# Altium PCB LED_PCB.PcbDoc
Units mm, origin at the board's own origin, x right, y up, seen from the top; angles counter-clockwise.
Board outline 99.87 x 66.87 mm, 2 copper layers (Top Layer, Bottom Layer); 110 components, 90 nets, 363 pads, 30 vias.
Unrouted connection lines stored in the file: 175.
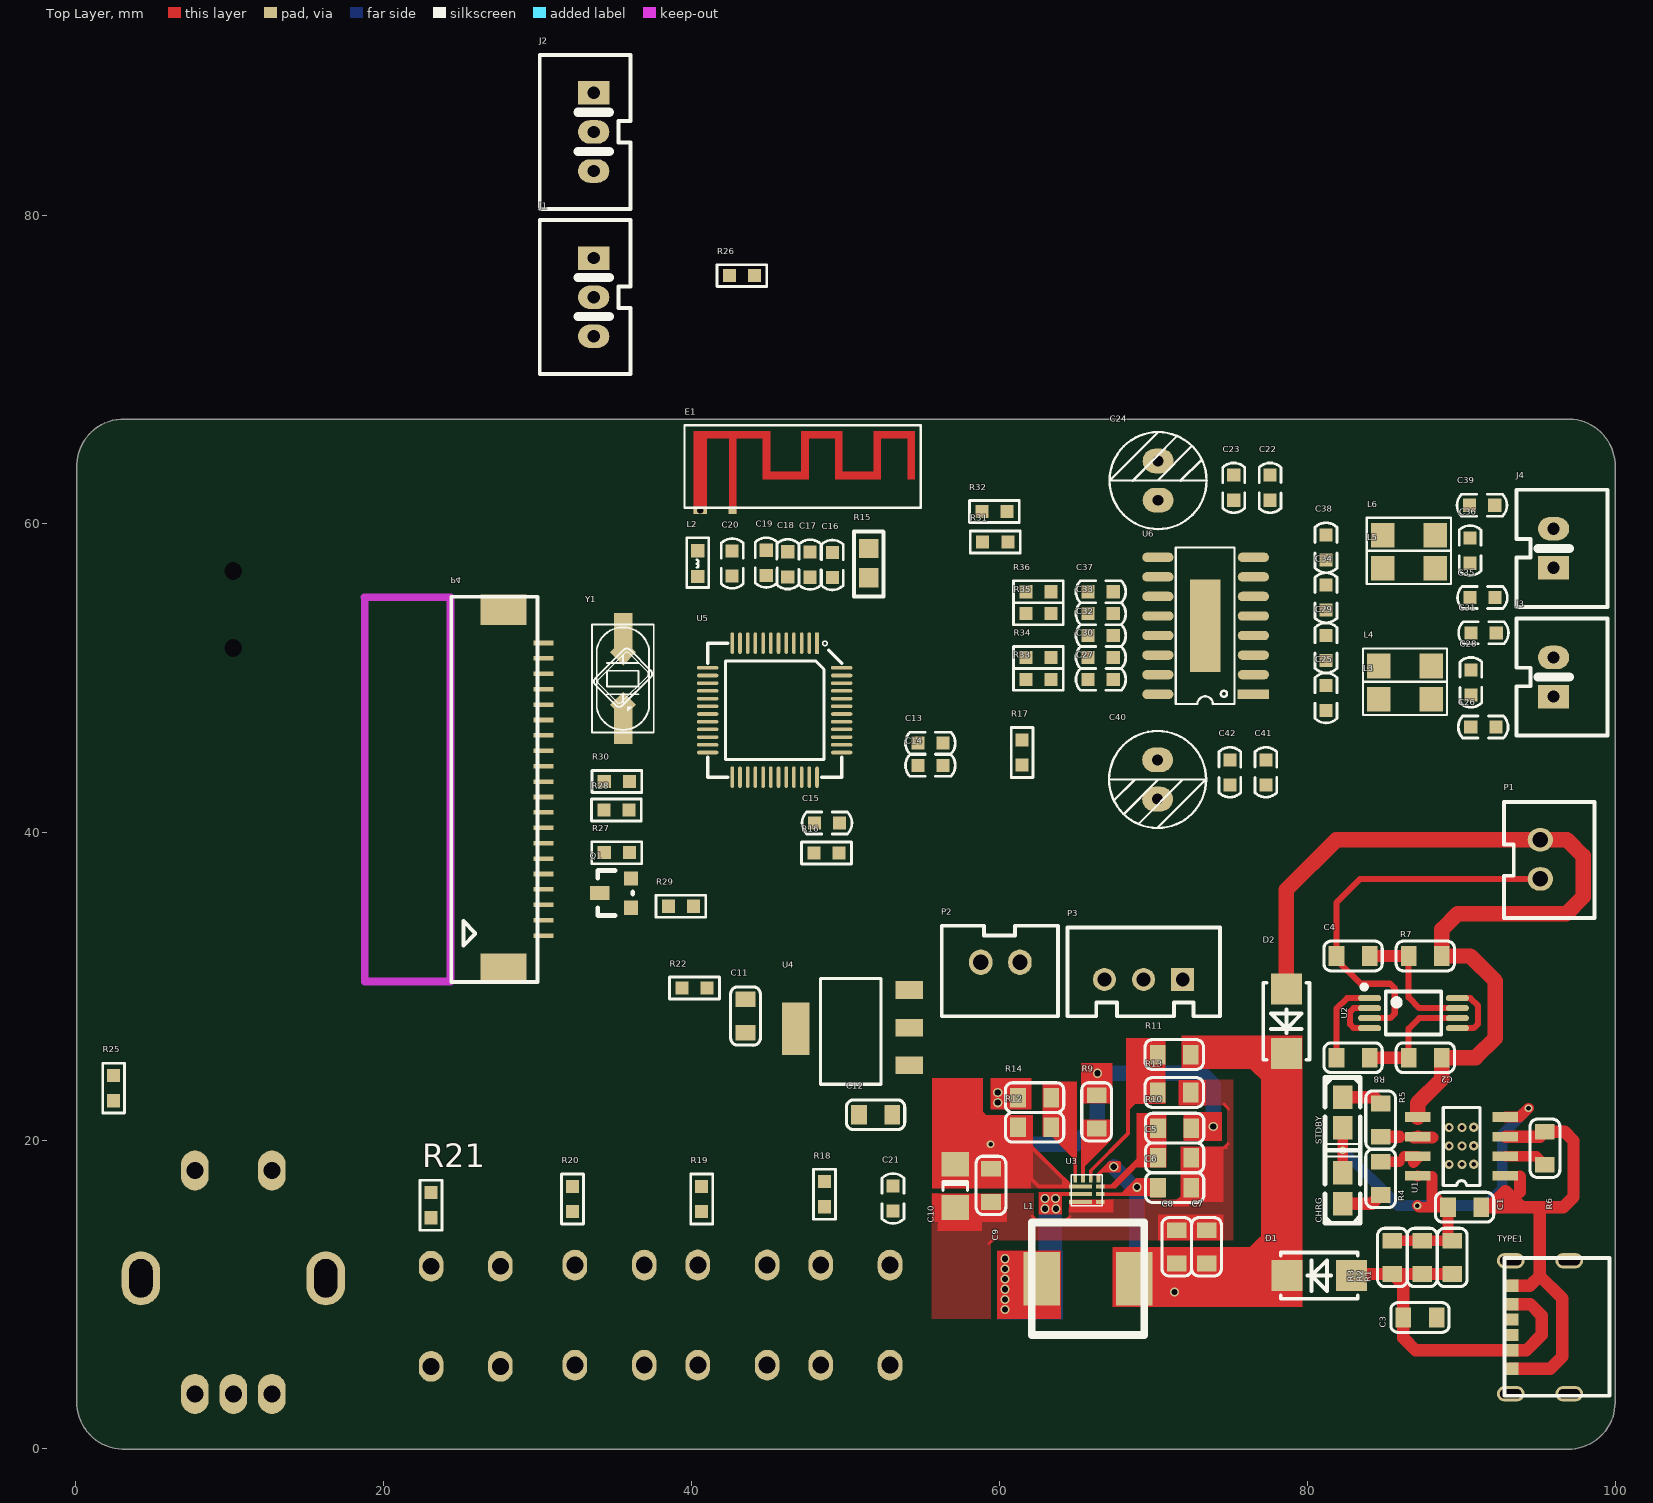
[diagram p0: Top Layer view]
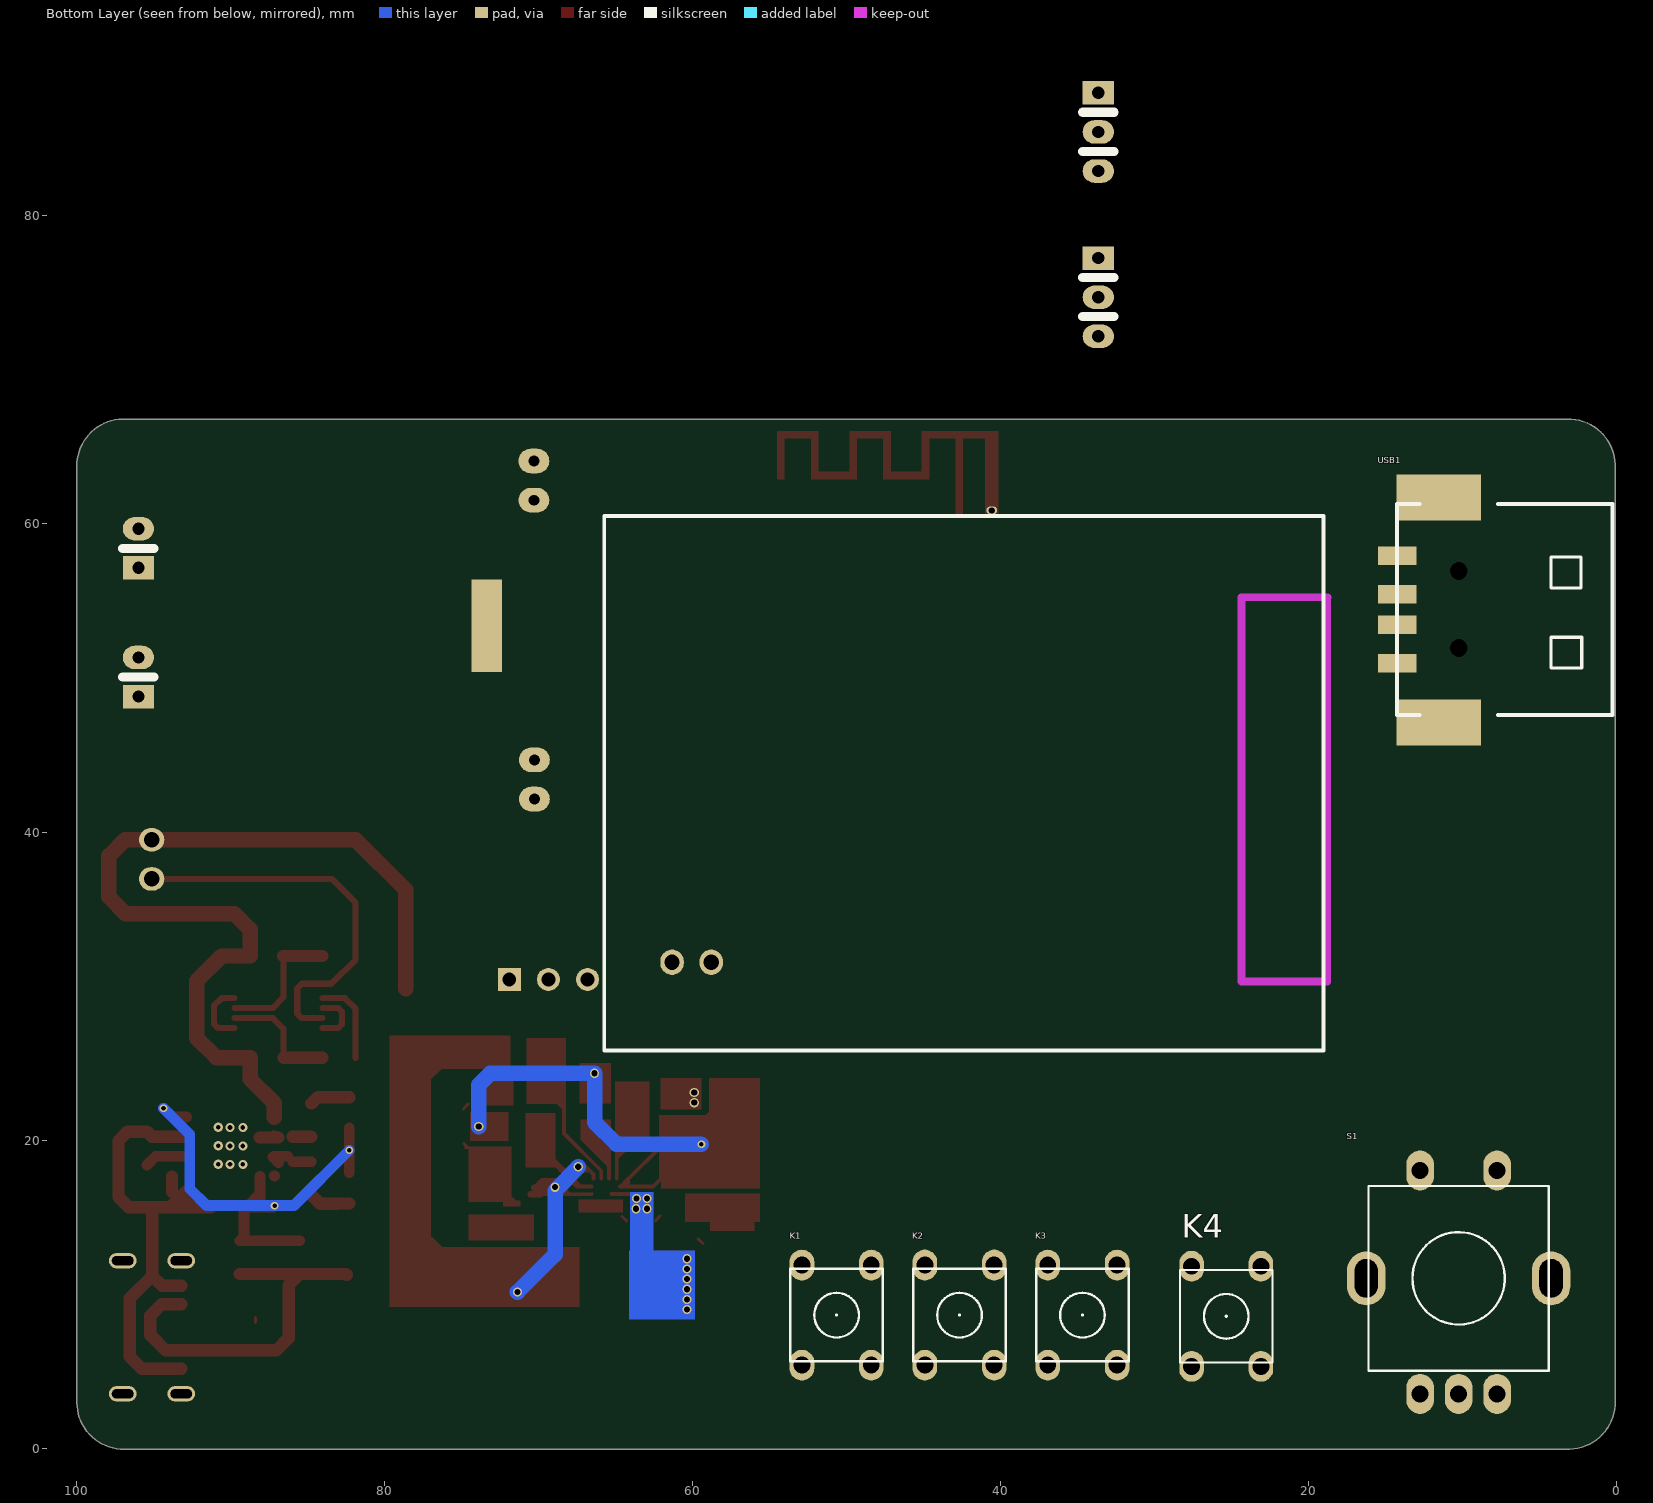
[diagram p1: Bottom Layer view, seen from below]

## Layer stack, top to bottom
Top Solder: solder mask 0.0102, Solder Resist, Dk 3.5
Top Layer: signal copper 0.0356
Dielectric 1: dielectric 0.32, FR-4, Dk 4.8
Bottom Layer: signal copper 0.0356
Bottom Solder: solder mask 0.0102, Solder Resist, Dk 3.5

## Board outline
0.081,2.784 0.081,22.784 cw(c0.208,22.784) 0.081,22.784 0.081,63.598 cw(c3.104,63.779) 2.917,66.802 cw(c3.104,63.779) 2.918,66.802 2.917,66.802 cw(c2.926,66.675) 2.926,66.802 96.698,66.802 cw(c96.698,66.675) 96.718,66.801 cw(c96.737,66.675) 96.729,66.802 cw(c96.915,63.779) 99.938,63.965 cw(c99.811,63.957) 99.938,63.957 99.938,3.143 cw(c96.915,2.962) 99.943,2.962 cw(c96.915,2.962) 97.126,-0.059 cw(c97.104,0.066) 97.104,-0.061 3.286,-0.061 cw(c3.104,2.962) 0.081,2.776 cw(c0.208,2.784)

## Design rules (kind name [scope] priority, off if disabled: settings)
Clearance [All] p1: gap=0
ComponentClearance [All] p1: gap=0 collisioncheckmode=3 verticalgap=0 showdistances=FALSE
HoleSize [All] p1: absolutevalues=TRUE maxlimit=10 minlimit=0 maxpercent=80.000 minpercent=20.000
HoleToHoleClearance [All] p1: gap=0 allowstackedmicrovias=TRUE
MinimumSolderMaskSliver [All] p1: minsoldermaskwidth=0
PolygonConnect [All] p1: connectstyle=Relief reliefconductorwidth=0.254 reliefentries=4 polygonreliefangle="90 Angle" airgapwidth=0.254
RoutingVias [All] p1: holewidth=0.711 width=1.27 viastyle="Through Hole" minholewidth=0 minwidth=0 maxholewidth=0.711 maxwidth=1.27
SilkToSilkClearance [All] p1: silktosilkclearance=0
SilkToSolderMaskClearance [IsPad] p1: minsilkscreentomaskgap=0 clearancetoexposedcopper=TRUE
SolderMaskExpansion [All] p1: expansion=0.102
Width [All] p1: maxlimit=10 minlimit=0.01 preferedwidth=0.254 minimp=50.000000 maximp=50.000000 favimp=50.000000
24 further rules are at their usual default settings.

## Classes and differential pairs
component class LED原理图: C1 C2 C3 C4 C5 C6 C7 C8 C9 C10 C11 C12 CHRG D1 D2 L1 P1 P2 P3 R1 R2 R3 R4 R5 R6 R7 R8 R9 R10 R11 R12 R13 R14 STDBY TYPE1 U1 U2 U3 U4 U?
component class BLE主控原理图: C13 C14 C15 C16 C17 C18 C19 C20 C21 E1 J1 J2 K1 K2 K3 K4 L2 P4 Q1 R15 R16 R17 R18 R19 R20 R21 R22 R25 R26 R27 R28 R29 R30 S1 U5 USB1 Y1
component class 功放原理图: C22 C23 C24 C25 C26 C27 C28 C29 C30 C31 C32 C33 C34 C35 C36 C37 C38 C39 C40 C41 C42 J3 J4 L3 L4 L5 L6 R31 R32 R33 R34 R35 R36 U6

## Components (designator, comment, footprint, x,y, rotation, side; value= is the part's Value field where it differs from the comment)
C1 "Cap" 0805C 89.091,15.644 r0 top
C2 "Cap" 0805C 88.699,25.347 r180 top
C3 "Cap" 0805C 88.354,8.481 r180 top
C4 "Cap" 0805C 81.852,31.951 r0 top
C5 "Cap" 0805C 72.426,18.848 r180 top
C6 "Cap" 0805C 70.269,16.918 r0 top
C7 "Cap" 0805C 73.419,14.149 r270 top
C8 "Cap" 0805C 71.488,14.149 r270 top
C9 "Cap" 0805C 59.423,18.137 r270 top
C10 "Cap2" C1206 57.112,17.019 r270 top
C11 "Cap" 0805C 43.485,26.975 r90 top
C12 "Cap" 0805C 53.01,21.641 r180 top
C13 "105" C0603 55.499,45.771 r0 top
C14 "105" C0603 55.499,44.323 r0 top
C15 "105" C0603 48.768,40.589 r180 top
C16 "105" C0603 49.124,57.328 r270 top
C17 "105" C0603 47.676,57.353 r270 top
C18 "105" C0603 46.228,57.379 r270 top
C19 "105" C0603 44.831,57.48 r270 top
C20 "2.7P" C0603 42.621,57.429 r270 top
C21 "NC/100pF" C0603 53.061,16.199 r270 top
C22 "104" C0603 77.546,62.357 r90 top
C23 "105" C0603 75.184,62.357 r90 top
C24 "220uF/25V" EC2.5-6.3 70.282,62.816 r90 top
C25 "105" C0603 81.174,48.692 r270 top
C26 "105" C0603 91.389,46.812 r0 top
C27 "225" C0603 66.546,49.911 r180 top
C28 "474" C0603 90.576,49.708 r270 top
C29 "105" C0603 81.174,51.943 r270 top
C30 "225" C0603 66.546,51.333 r180 top
C31 "105" C0603 91.415,52.934 r0 top
C32 "105" C0603 66.546,52.756 r180 top
C33 "225" C0603 66.546,54.178 r180 top
C34 "105" C0603 81.178,55.22 r90 top
C35 "105" C0603 91.338,55.22 r0 top
C36 "474" C0603 90.526,58.268 r270 top
C37 "225" C0603 66.546,55.601 r180 top
C38 "105" C0603 81.178,58.471 r90 top
C39 "105" C0603 91.313,61.214 r0 top
C40 "220uF/25V" EC2.5-6.3 70.231,43.411 r270 top
C41 "105" C0603 77.267,43.868 r270 top
C42 "104" C0603 74.93,43.868 r270 top
CHRG "RED" LED-0805 82.258,15.879 r90 top
D1 "SS34" LC-SMA(DO-214AC)_S2 80.734,11.199 r0 top
D2 "SS34" LC-SMA(DO-214AC)_S2 78.6,27.713 r90 top
E1 "BT_ANT" 新F天线 42.647,60.884 r0 top
J1 "LED" CON-3X2.54 33.63,74.727 r270 top
J2 "CON3" CON-3X2.54 33.63,85.454 r270 top
J3 "喇叭" CON-2X2.54 95.946,48.793 r90 top
J4 "喇叭" CON-2X2.54 95.946,57.15 r90 top
K1 "" KEY 50.622,8.636 r270 bottom
K2 "" KEY 42.641,8.636 r270 bottom
K3 "" KEY 34.661,8.636 r270 bottom
K4 "" KEY 25.324,8.56 r270 bottom
L1 "Inductor" 电感SMD 65.72,10.999 r180 top
L2 "NC" L0603 40.386,57.429 r270 top
L3 "100R/10uH" R1206 86.309,48.616 r180 top
L4 "100R/10uH" R1206 86.309,50.775 r180 top
L5 "100R/10uH" R1206 86.563,57.125 r180 top
L6 "100R/10uH" R1206 86.563,59.258 r180 top
P1 "Header 2" XH2.54-2 95.092,39.498 r90 top
P2 "Header 2" XH2.54-2 61.306,31.544 r0 top
P3 "Header 3" XH2.54-3 71.869,30.427 r180 top
P4 "串口彩屏" FFC-P20-1MM 29.083,42.774 r90 top
Q1 "S9014" SOT23 35.027,36.093 r90 top
R1 "Res2" 0805R 89.37,11.3 r90 top
R2 "Res2" 0805R 87.414,11.3 r90 top
R3 "Res2" 0805R 85.484,11.3 r90 top
R4 "Res2" 0805R 84.722,16.431 r90 top
R5 "Res2" 0805R 84.722,22.375 r270 top
R6 "Res2" 0805R 95.39,20.546 r270 top
R7 "Res2" 0805R 88.699,31.951 r180 top
R8 "Res2" 0805R 81.852,25.347 r0 top
R9 "Res2" 0805R 66.281,20.753 r90 top
R10 "Res2" 0805R 70.269,20.778 r0 top
R11 "Res2" 0805R 72.403,25.554 r180 top
R12 "Res2" 0805R 63.332,20.829 r180 top
R13 "Res2" 0805R 72.403,23.09 r180 top
R14 "Res2" 0805R 61.176,22.76 r0 top
R15 "4R7" R0805 51.486,57.455 r270 top
R16 "4R7" R0603 48.743,38.633 r0 top
R17 "0R" R0603 61.443,45.161 r90 top
R18 "22K" R0603 48.616,16.485 r270 top
R19 "3K" R0603 40.64,16.18 r270 top
R20 "6.2K" R0603 32.258,16.18 r270 top
R21 "9.1K" R0603 23.063,15.773 r270 top
R22 "33K" R0603 40.181,29.87 r180 top
R25 "2R7" R0603 2.464,23.368 r90 top
R26 "1K" R0603 43.256,76.124 r180 top
R27 "0R" R0603 35.13,38.659 r180 top
R28 "3K" R0603 35.103,41.427 r0 top
R29 "10K" R0603 39.296,35.179 r180 top
R30 "10K" R0603 35.128,43.282 r0 top
R31 "10K" R0603 59.7,58.826 r180 top
R32 "10K" R0603 59.649,60.808 r180 top
R33 "1K" R0603 62.505,49.909 r180 top
R34 "1K" R0603 62.505,51.331 r180 top
R35 "1K" R0603 62.505,54.176 r180 top
R36 "1K" R0603 62.505,55.598 r180 top
S1 "编码器" BMQ+PUSH 10.236,11.024 r180 bottom
STDBY "GREEN" LED-0805 82.258,22.787 r270 top
TYPE1 "TYPE-CF-6P-RAT-L6.8W" TYPE-CF-6P-RAT-L6.8W 96.139,7.849 r90 top
U1 "TC4056A" SOP-8 92.824,17.682 r180 top
U2 "DW03D" LC-TSSOP-8_3x4.4x065P 86.855,28.242 r270 top
U3 "SY7065" QFN2*2-10 65.646,16.74 r0 top
U4 "AMS1117-3.3" SOT-233 54.111,24.868 r180 top
U5 "AC6951C" LQFP48 45.39,47.904 r270 top
U6 "CS8676" SOP16-EP 76.759,48.946 r180 top
USB1 "USB" USBSMT 10.236,51.943 r90 bottom
Y1 "HS-24M" JZ 35.535,49.962 r0 top

## Footprints (in the part's own frame and the unit in brackets; to place one, negate y for a bottom-side part, rotate by r counter-clockwise, add the part's x,y. Pads: shape width x height; smd on the part's side, far side on the other; paste and mask are expansions set on the pad)
0805C [mil]
  rect 40x50 smd: 1(0,0) 2(85,0)
  silkscreen extent -32,-38 117,38, body extent 3,-25 82,25, height 30
0805R [mil]
  rect 40x50 smd: 1(0,0) 2(85,0)
  silkscreen extent -32,-38 117,38, body extent 3,-25 82,25, height 30
BMQ+PUSH [mm]
  oval 1.8x2.6 hole 1.1: 1(-2.5,-7.5) 2(0,-7.5) 3(2.5,-7.5) 4(-2.5,7) 5(2.5,7)
  oval 2.5x3.5 hole 1.5 slot 2.5 at 90 deg: 6(-6,0) 7(6,0)
  silkscreen extent -5.85,-6 5.85,6
C0603 [mm]
  rect 0.85x0.85 smd: 1(-0.815,0) 2(0.815,0)
  silkscreen extent -1.63,-0.71 1.61,0.71
C1206 [mm] "Chip Capacitor; Body 3.2 x 1.6 mm (LxW typ)"
  rect 1.6x1.8 smd: 1(-1.4,0) 2(1.4,0)
  silkscreen extent -0.3,-0.8 0.3,0.8
CON-2X2.54 [mil]
  rect 60x80 hole 31.5: 1(0,0)
  oval 60x80 hole 31.5: 2(100,0)
  silkscreen extent -100,-138 200,94
CON-3X2.54 [mil]
  rect 60x80 hole 31.5: 1(-100,0)
  oval 60x80 hole 31.5: 2(0,0) 3(100,0)
  silkscreen extent -197,-138 197,94
EC2.5-6.3 [mm]
  oval 1.6x2 hole 0.7: 1(-1.27,0.01) 2(1.27,0.01)
  silkscreen extent -3.15,-3.14 3.15,3.16
FFC-P20-1MM [mm]
  rect 0.3x1.3 smd: 1(-9.5,-1.3) 2(-8.5,-1.3) 3(-7.5,-1.3) 4(-6.5,-1.3) 5(-5.5,-1.3) 6(-4.5,-1.3) 7(-3.5,-1.3) 8(-2.5,-1.3) 9(-1.5,-1.3) 10(-0.5,-1.3) 11(0.5,-1.3) 12(1.5,-1.3) 13(2.5,-1.3) 14(3.5,-1.3) 15(4.5,-1.3) 16(5.5,-1.3) 17(6.5,-1.3) 18(7.5,-1.3) 19(8.5,-1.3) 20(9.5,-1.3)
  rect 2x3 smd: 21(11.651,1.3) 22(-11.651,1.3)
  silkscreen extent -12.5,-0.9 12.5,4.7
JZ [mm]
  rect 1.2x2.5 smd: 1(0,-3) 2(0,3)
  rect 1.2x1.2 smd rot 45: 1(0,-1.7) 2(0,1.7)
  rect 1.2x1.2 on Top Overlay rot 45: 3(1.7,0) 4(-1.7,0)
  silkscreen extent -2.01,-3.5 1.99,3.5
KEY [mm]
  oval 2x1.6 hole 1.1: 1(-3.25,2.25) 1(3.25,2.25) 2(-3.25,-2.25) 2(3.25,-2.25)
  silkscreen extent -3,-3 3,3
L0603 [mm]
  rect 0.85x0.85 smd: 1(-0.83,0) 2(0.83,0)
  silkscreen extent -1.68,-0.71 1.56,0.71
LC-SMA(DO-214AC)_S2 [mm]
  rect 2x2 smd: 1(2.1,0) 2(-2.1,0)
  silkscreen extent -2.5,-1.5 2.5,1.5
LC-TSSOP-8_3x4.4x065P [mm]
  oval 0.4x1.5 smd mask+0.051: 1(-0.975,-2.85) 2(-0.325,-2.85) 3(0.325,-2.85) 4(0.975,-2.85) 5(0.975,2.85) 6(0.325,2.85) 7(-0.325,2.85) 8(-0.975,2.85)
  silkscreen extent -1.85,-3.35 1.4,1.8
LED-0805 [mil]
  rect 60x50 smd: 1(0,0) 2(78.74,0)
  silkscreen extent -50,-45 136,45
LQFP48 [mm]
  rect 1.4x0.23 smd: 1(-4.357,2.739)
  oval 1.4x0.23 smd: 2(-4.357,2.239) 3(-4.357,1.739) 4(-4.357,1.239) 5(-4.357,0.739) 6(-4.357,0.239) 7(-4.357,-0.261) 8(-4.357,-0.761) 9(-4.357,-1.261) 10(-4.357,-1.761) 11(-4.357,-2.261) 12(-4.357,-2.761) 25(4.343,-2.761) 26(4.343,-2.261) 27(4.343,-1.761) 28(4.343,-1.261) 29(4.343,-0.761) 30(4.343,-0.261) 31(4.343,0.239) 32(4.343,0.739) 33(4.343,1.239) 34(4.343,1.739) 35(4.343,2.239) 36(4.343,2.739)
  oval 0.23x1.4 smd: 13(-2.757,-4.361) 14(-2.257,-4.361) 15(-1.757,-4.361) 16(-1.257,-4.361) 17(-0.757,-4.361) 18(-0.257,-4.361) 19(0.243,-4.361) 20(0.743,-4.361) 21(1.243,-4.361) 22(1.743,-4.361) 23(2.243,-4.361) 24(2.743,-4.361) 37(2.743,4.339) 38(2.243,4.339) 39(1.743,4.339) 40(1.243,4.339) 41(0.743,4.339) 42(0.243,4.339) 43(-0.257,4.339) 44(-0.757,4.339) 45(-1.257,4.339) 46(-1.757,4.339) 47(-2.257,4.339) 48(-2.757,4.339)
  silkscreen extent -4.49,-4.36 4.34,4.34
QFN2*2-10 [mm]
  rect 1.5x0.25 smd: 1(-0.4,0.25) 2(-0.4,-0.25) 3(-0.4,-0.75)
  rect 0.55x0.25 smd mask+0.102: 4(0.875,-0.75)
  rect 0.55x0.25 smd: 5(0.875,-0.25) 6(0.875,0.25)
  rect 0.25x0.5 smd: 7(0.75,0.75) 8(0.25,0.75) 9(-0.25,0.75) 10(-0.75,0.75)
  silkscreen extent -1,-1 1,1, body extent -1.47,-1 1.01,1.01, height 63.5
R0603 [mm]
  rect 0.85x0.85 smd: 1(-0.815,0) 2(0.815,0)
  silkscreen extent -1.62,-0.71 1.62,0.71
R0805 [mm]
  rect 1.25x1.25 smd: 1(-0.96,0.007) 2(0.94,0.007)
  silkscreen extent -2.06,-0.95 2.16,0.96
R1206 [mm]
  rect 1.52x1.6 smd: 1(-1.71,0) 2(1.71,0)
  silkscreen extent -2.73,-1.14 2.74,1.02
SOP16-EP [mm]
  rect 2x6 all layers, no hole: 0(3.429,-4.445)
  rect 2.032x0.61 smd: 1(0.3,0)
  oval 2.032x0.61 smd: 2(0.3,-1.27) 3(0.3,-2.54) 4(0.3,-3.81) 5(0.3,-5.08) 6(0.3,-6.35) 7(0.3,-7.62) 8(0.3,-8.89) 9(6.5,-8.89) 10(6.5,-7.62) 11(6.5,-6.35) 12(6.5,-5.08) 13(6.5,-3.81) 14(6.5,-2.54) 15(6.5,-1.27) 16(6.5,0)
  silkscreen extent 1.52,-9.53 5.33,0.64
SOP-8 [mil]
  rect 65x25 smd: 1(0,0) 2(0,-50) 3(0,-100) 4(0,-150) 5(224.41,-150) 6(224.41,-100) 7(224.41,-50) 8(224.41,0)
  silkscreen extent 65,-175 159,25
SOT23 [mil]
  rect 36x36 smd: 1(-39.7,-40) 2(35.3,-40)
  rect 36x50 smd: 3(-2.2,40)
  silkscreen extent -60,-45 55,45
SOT-233 [mil]
  rect 70x45 smd: 1(0,0) 2(0,-95.04) 3(0,-192)
  rect 70x135 smd: 4(290.35,-92.95)
  silkscreen extent 72,-221 227,49
TYPE-CF-6P-RAT-L6.8W [mm]
  oval 1x1.8 hole 1.4 slot 0.6 at 0 deg unplated: 0(-4.32,-0.829) 0(-4.32,2.971) 0(4.32,-0.829) 0(4.32,2.971)
  rect 0.8x1 smd: 1(-2.7,2.971) 2(-1.5,2.971) 3(-0.5,2.971) 4(0.5,2.971) 5(1.5,2.971) 6(2.7,2.971)
  silkscreen extent -4.44,-3.43 4.49,3.37, body extent -4.44,-3.98 4.5,3.92, height 1.61
USBSMT [mm]
  rect 1.2x2.5 smd: 1(-1,4) 2(1.5,4) 3(3.5,4) 4(6,4)
  rect 3x5.5 smd: 5(-4.837,1.3) 6(9.773,1.3)
  round 0 hole 1.15: 7(5,0) 8(0,0)
  silkscreen extent -4.36,-10 9.36,4
XH2.54-2 [mil]
  oval 60x65 hole 39.37: 1(0,0) 2(-100.1,0)
  silkscreen extent -200,-138 97,93, body extent -198,-142 98,94, height 276
XH2.54-3 [mm]
  rect 1.5x1.5 hole 0.9: 1(0,0)
  round 1.5 hole 0.9: 2(2.54,0) 3(5.08,0)
  silkscreen extent -2.41,-3.38 7.47,2.39, body extent -2.41,-3.41 7.49,2.34, height 7
新F天线 [mm]
  rect 0.5x0.5 smd mask+0.003: 1(0,0)
  rect 0.5x0.5 on Top Solder mask+0.003: 1(0,0)
  rect 0.9x0.5 smd mask+0.003: 2(-2.1,0)
  oval 0.7x0.5 hole 0.4 mask+0.01: 2(-2.1,0)
  rect 0.9x0.5 on Top Solder: 2(-2.1,0)
  Top Layer region: 11.351,2.01 11.851,2.01 11.851,5.15 11.351,5.15
  Top Layer region: 9.151,2.01 9.651,2.01 9.651,5.15 9.151,5.15
  Top Layer region: 6.651,2.01 7.151,2.01 7.151,5.15 6.651,5.15
  Top Layer region: 1.951,2.01 4.951,2.01 4.951,2.51 1.951,2.51
  Top Layer region: -2.549,4.65 2.451,4.65 2.451,5.15 -2.549,5.15
  Top Layer region: -2.549,-0.25 -1.65,-0.25 -1.65,5.15 -2.549,5.15
  Top Layer region: -0.247,-0.25 0.253,-0.25 0.253,5.15 -0.247,5.15
  Top Layer region: 1.951,2.01 2.451,2.01 2.451,5.15 1.951,5.15
  Top Layer region: 4.451,2.01 4.951,2.01 4.951,5.15 4.451,5.15
  Top Layer region: 4.451,4.65 7.151,4.65 7.151,5.15 4.451,5.15
  Top Layer region: 6.651,2.01 9.651,2.01 9.651,2.51 6.651,2.51
  Top Layer region: 9.151,4.65 11.851,4.65 11.851,5.15 9.151,5.15
  silkscreen extent -3.13,0.18 12.22,5.53
电感SMD [mm]
  rect 2.35x3.5 smd: 1(-3,0) 2(3,0)
  silkscreen extent -3.65,-3.65 3.65,3.65

## Part data
C1 C2 C3 C4 C5 C6 C7 C8 C9 C10 C11 C12: "Capacitor"
C13 C14 C15 C16 C17 C18 C19 C20 C21 C22 C23 C25 C26 C27 C28 C29 C30 C31 C32 C33 C34 C35 C36 C37 C38 C39 C41 C42: library part CAP-0603
C24 C40: library part +CAP
CHRG STDBY: library part LED0, "Typical INFRARED GaAs LED"
D1 D2: library part Diode, "Default Diode"
J1: library part CON3, "Connector"
J2: "Connector"
J3 J4: library part CON2, "Connector"
K1 K2 K3 K4: library part Key
L2 L3 L4 L5 L6: library part L
P1 P2: "Header, 2-Pin"
P3: "Header, 3-Pin"
P4: library part LCD-20P
Q1: library part NPN
R1 R2 R3 R4 R5 R6 R7 R8 R9 R10 R11 R12 R13 R14: "Resistor"
R15 R17 R18 R19 R20 R21 R22 R26 R27 R28 R29 R30 R31 R32 R33 R34 R35 R36: library part RES-0603
R16 R25: library part RES
S1: library part CON7, "Connector"
Y1: library part CRYSTAL

## Free pads (board coordinates)
  rect 2.35x4 on Top Solder: 0(89.98,19.587)
  rect 2.35x4 on Bottom Solder: 1(89.903,19.562)

## Via types
v1: diameter 0.6, hole 0.4, Top Layer to Bottom Layer, 17 vias
v2: diameter 0.6, hole 0.3, Top Layer to Bottom Layer, 8 vias
v3: diameter 0.5, hole 0.3, Top Layer to Bottom Layer, 4 vias
v4: diameter 0.6/0.6 (per signal layer), hole 0.3, Top Layer to Bottom Layer, 1 vias

## Nets (pads, with @x,y where several pads share a name; then routed paths per layer and width w, separated by ;. In a path a pad name is that pad's centre, name@x,y a point inside that pad or via, vN(x,y) a via of type N, cw(c..) or ccw(c..) an arc to the next point about the centre after c; other vN are vias at no path point)
5V: C11.2 C22.1 C23.1 C24.1 C40.1 C41.1 C42.1 J1.1 P3.2 R15.1 R25.1 U4.3 U6.9 U6.16
+3.3V: C12.2 C17.2 J2.3 P4.4 R16.2 R18.2 R27.1 R28.2 U4.2 U4.4 U5.3
/CS: P4.7 U5.16
/RSTB: P4.8 U5.17
AD_KEY: C21.1 K1.1 R18.1 R19.1 R20.1 R21.1 R22.1 U5.22
AGND: C13.2 C14.2 C15.1 C22.2 C23.2 C24.2 C26.2 C31.2 C32.2 C35.2 C39.2 C40.2 C41.2 C42.2 R17.2 R34.2 R35.2 U5.36
BAT+: C2.1 D2.1 P1.1 R7.1 U1.5 | length 58.3
  Top Layer w1: D2.1 78.6,36.257 81.841,39.498 P1.1 96.822,39.498 97.866,38.454 97.866,35.787 96.774,34.695 89.713,34.695 88.699,33.682 R7.1 90.538,31.951 92.164,30.325 92.164,26.617 90.894,25.347 C2.1 88.699,23.965 87.124,22.39 U1.5
BL_A: P4.2 R27.2
BL_K: P4.1 Q1.3
BL_LIGHT: R29.1 U5.21
BT_ANT: C20.1 E1.1@42.647,60.884
BT_RF: C20.2 L2.2 U5.12
BTAVDD: C19.2 U5.11
CTRL: R31.1 R32.1 U6.10
DACL: R36.2 U5.39
DACR: R33.2 U5.40
DACVDD: C13.1 U5.38
DB0: P4.19 U5.25
DB1: P4.18 U5.26
DB2: P4.17 U5.27
DB3: P4.16 U5.28
DB4: P4.15 U5.29
DB5: P4.14 U5.30
DB6: P4.13 U5.31
DB7: P4.12 U5.32
GND: C1.2 C2.2 C3.1 C5.1 C6.2 C7.1 C8.1 C9.2 C10.2 C11.1 C12.1 C16.1 C17.1 C18.1 C19.1 C21.2 E1.2@40.547,60.884 J1.3 J2.2 K1.2 K2.2 K3.2 K4.2 L2.1 P2.2 P4.3 P4.20 Q1.2 R6.1 R8.2 R13.1 R14.1 R17.1 R30.2 R32.2 S1.2 S1.5 S1.6 S1.7 TYPE1.1 TYPE1.6 U1.1 U1.3 U2.6 U3.3 U3.4 U4.1 U5.13 USB1.1 USB1.5 USB1.6 | length 47.4
  Top Layer w0.2: 59.296,13.285 59.601,13.565 ; 62.09,15.063 62.37,14.759 ; 64.249,14.759 64.554,15.038 ; 71.514,16.029 71.819,16.308 ; 74.511,19.483 74.816,19.762 ; 74.562,22.328 74.841,22.023 ; C3.1@88.354,8.151 C3.1
  Top Layer w0.4: C2.2 86.54,27.241 87.216,27.917 U2.6
  Top Layer w0.8: R8.2 86.515,25.347 85.753,25.347 ; C1.2 91.783,15.644 ; U1.3 95.066,20.222 R6.1 96.657,20.546 97.244,19.959 97.244,16.304 96.584,15.644 94.793,15.644 ; TYPE1.1 95.725,5.149 96.52,5.944 96.52,9.71 95.047,11.184 ; TYPE1.6 94.412,10.549 95.047,11.184 ; 93.764,16.634 93.764,17.631 ; 91.783,15.644 92.824,16.685 ; 91.783,15.644 92.901,15.644 ; 92.824,16.685 92.824,15.72 92.901,15.644 ; 92.824,16.685 93.866,15.644 ; 92.901,15.644 93.866,15.644 ; 93.866,15.644 94.793,15.644 ; 94.793,15.644 95.047,15.39 95.047,11.184
  other v1: 59.861,22.429 59.861,23.09
HPVDD: C15.2 R16.1 U5.35
IRDA: R26.1 U5.8
LED: J1.2 U5.9
MUTE: R31.2 U5.45
NetC1_1: C1.1 CHRG.2 R1.2 R2.2 R3.2 STDBY.2 U1.4 U1.8 | length 35.4
  Top Layer w0.7: CHRG.2 v3(82.258,19.333) STDBY.2 ; R3.2 R2.2 R1.2 89.091,13.739 C1.1 C1.1@88.913,15.644 ; v3(87.109,15.745) 87.211,15.644 C1.1@88.913,15.644 ; U1.8@87.109,17.667 U1.8 ; 88.049,15.695 88.049,17.616 ; 88.064,17.631 88.064,16.492 C1.1@88.913,15.644 ; C1.1@88.964,15.593 C1.1@88.913,15.644 ; U1.4 93.745,21.492 v3(94.323,22.07)
  Bottom Layer w0.7: v3(82.258,19.333) 85.846,15.745 v3(87.109,15.745) 91.529,15.745 92.621,16.838 92.621,20.368 v3(94.323,22.07)
NetC4_1: C4.1 P1.2 U2.3 | length 25.5
  Top Layer w0.4: U2.3 85.337,27.917 85.636,28.217 85.636,29.842 85.331,30.147 83.426,30.147 81.852,31.722 C4.1 81.852,35.408 83.4,36.956 P1.2
NetC4_2: C4.2 R7.2 U2.7 | length 8.7
  Top Layer w0.4: R7.2 86.54,29.269 87.242,28.567 U2.7
  Top Layer w0.8: C4.2 R7.2
NetC5_2: C5.2 R10.1 U3.6 | length 7.1
  Top Layer w0.25: U3.6 67.243,16.99 ; 66.993,16.986 67.239,16.986 ; 67.467,16.986 67.463,16.99 ; 69.202,18.721 68.974,18.492 ; 69.38,19.061 69.314,19.061 68.745,18.492 ; 67.239,16.986 67.243,16.99 ; 67.239,16.986 67.459,16.986 67.463,16.99 ; 67.243,16.99 68.745,18.492 ; 67.243,16.99 67.463,16.99 ; 67.463,16.99 68.34,17.867 68.348,17.867 68.974,18.492 ; 68.745,18.492 68.974,18.492
NetC6_1: C6.1 C7.2 C8.2 D1.2 D2.2 L1.1 R11.1 U3.5 U3.7 | length 68.7
  Top Layer w0.25: U3.7 66.396,17.769 66.711,18.084 ; U3.5 66.525,16.486 67.958,16.486 ; v1(67.399,18.264) 67.348,18.213 66.84,18.213 ; 68.593,16.689 v1@68.771,16.689 ; v1@68.961,16.879 68.898,16.816 v1@68.771,16.689 ; v1@69.05,16.791 69.253,16.994 69.253,17.07 ; C6.1@69.837,16.486 69.431,16.486 ; C6.1 C6.1@70.091,17.095 ; 66.711,18.084 66.84,18.213 ; 66.711,18.084 66.76,18.035 67.018,18.035 ; 66.84,18.213 67.145,18.518 67.729,18.518 67.755,18.492 67.755,18.086 67.704,18.035 67.399,18.035 67.018,18.035 ; 66.84,18.213 67.018,18.035 ; 67.958,16.486 68.898,17.426 69.202,17.426 ; 67.958,16.486 68.263,16.486 ; 68.263,16.486 69.05,17.273 ; 68.263,16.486 69.179,16.486 ; v1@68.771,16.689 69.142,16.689 69.244,16.791 69.523,17.07 ; 69.05,17.273 69.253,17.07 ; 69.05,17.273 69.202,17.426 ; 69.05,17.273 69.726,17.273 ; 69.179,16.486 69.329,16.587 69.431,16.486 ; 69.179,16.486 69.431,16.486 ; 69.202,17.426 69.761,17.426 C6.1@69.914,17.273 ; 69.253,17.07 69.523,17.07 ; 69.523,17.07 70.066,17.07 C6.1@70.091,17.095 ; 69.523,17.07 69.726,17.273 ; 69.726,17.273 C6.1@69.914,17.273 ; C6.1@69.914,17.273 C6.1@70.091,17.095
  Top Layer w0.4: C6.1 C6.1@70.142,16.791 ; C6.1@70.498,16.486 69.837,16.486 C6.1@70.142,16.791 ; v1(71.336,10.136) 71.514,10.314 71.514,10.39 ; C8.2 C7.2 ; v1@69.05,16.791 68.898,16.791 68.898,16.816 v1(68.898,16.943) 68.961,16.879 v1@69.05,16.791 ; v1@69.05,16.791 69.244,16.791 C6.1@70.142,16.791
  Top Layer w0.5: 78.6,15.356 78.642,15.314 78.727,15.229
  Top Layer w0.8: 71.946,10.06 72.377,10.491 D1.2@78.169,10.491 ; R11.1 78.6,25.554 78.6,15.898 ; 76.238,12.189 76.238,12.52 77.102,13.383 ; 76.543,24.889 77.356,24.077 77.356,22.984 ; 78.169,15.491 78.6,15.461 ; D1.2@78.6,10.898 78.6,15.229 ; 78.727,15.229 78.642,15.229 78.6,15.229 ; 78.6,15.229 78.6,15.356 78.6,15.413 ; 78.6,15.229 78.431,15.229 78.6,15.413 ; 78.6,15.413 78.6,15.461 ; 78.6,15.413 78.642,15.458 ; 78.6,15.461 78.6,15.465 ; 78.6,15.461 78.642,15.458 ; 78.6,15.465 78.642,15.458 ; 78.6,15.465 78.228,15.525 78.6,15.898 ; 78.6,15.465 78.6,15.898
  Top Layer w2: D1.2@78.642,11.275 78.642,15.229 78.642,15.314 78.642,15.458
  Bottom Layer w0.5: v1@68.898,16.714 v1(68.898,16.943)
  Bottom Layer w1.016: v1(67.399,18.264) 68.783,16.833 68.898,16.714 68.898,12.574 v1(71.336,10.136)
NetC25_1: C25.1 L3.2 U6.2
NetC25_2: C25.2 U6.1
NetC26_1: C26.1 C28.2 J3.1 L3.1
NetC27_1: C27.1 U6.15
NetC27_2: C27.2 R33.1
NetC28_1: C28.1 C31.1 J3.2 L4.1
NetC29_1: C29.1 L4.2 U6.4
NetC29_2: C29.2 U6.3
NetC30_1: C30.1 U6.14
NetC30_2: C30.2 R34.1
NetC32_1: C32.1 U6.13
NetC33_1: C33.1 U6.12
NetC33_2: C33.2 R35.1
NetC34_1: C34.1 L5.2 U6.5
NetC34_2: C34.2 U6.6
NetC35_1: C35.1 C36.2 J4.1 L5.1
NetC36_1: C36.1 C39.1 J4.2 L6.1
NetC37_1: C37.1 U6.11
NetC37_2: C37.2 R36.1
NetC38_1: C38.1 L6.2 U6.7
NetC38_2: C38.2 U6.8
NetCHRG_1: CHRG.1 R4.1 | length 2.7
  Top Layer w0.8: CHRG.1 83.064,15.879 83.071,15.872 84.163,15.872 R4.1
NetJ2_1: J2.1 R26.2
NetK2_1: K2.1 R19.2
NetK3_1: K3.1 R20.2
NetK4_1: K4.1 R21.2
NetL1_2: L1.2 U3.2 | length 2.4
  Top Layer w0.25: v1@62.856,16.49 63.614,16.49 U3.2
  other v1: 60.338,8.993 60.338,9.653 60.338,10.314 60.338,10.974 60.338,11.634 60.338,12.295 62.929,15.546 63.64,15.546 62.929,16.206 63.614,16.206
NetQ1_1: Q1.1 R29.2
NetR4_2: R4.2 U1.7 | length 2.6
  Top Layer w0.7: R4.2 85.916,18.59 ; 86.277,18.952 U1.7 ; 86.855,18.539 87.196,18.88 U1.7@87.217,18.901
NetR5_1: R5.1 STDBY.1 | length 2.6
  Top Layer w0.8: STDBY.1 84.31,22.787 R5.1
NetR5_2: R5.2 U1.6 | length 3.8
  Top Layer w0.245: 85.814,20.089 85.941,20.216 85.947,20.222 ; U1.6@86.887,20.171 88.064,20.171
  Top Layer w0.8: R5.2 85.687,20.216 85.941,20.216 ; U1.6@86.881,20.165 87.124,20.165 88.064,20.165 ; U1.6@87.124,20.216 U1.6@87.16,20.216
NetR6_2: R6.2 U1.2 | length 2.8
  Top Layer w0.7: U1.2 94.825,18.952 R6.2
NetR8_1: R8.1 U2.1 | length 5.6
  Top Layer w0.4: R8.1 81.852,28.522 82.547,29.217 U2.1
NetR9_1: R9.1 U3.9 | length 16
  Top Layer w0.25: U3.9 65.396,18.391 ; 66.104,20.143 65.396,19.436 ; R9.1@66.434,20.728 65.621,19.915 ; 67.12,20.067 65.443,18.391 65.396,18.391 ; 65.396,18.391 65.396,18.674 ; 65.396,18.674 66.878,20.156 66.891,20.169 66.815,20.169 65.545,18.899 65.396,18.899 ; 65.396,18.674 65.396,18.899 ; 65.396,18.899 65.396,18.979 ; 65.396,18.979 66.586,20.169 66.26,20.169 65.396,19.305 ; 65.396,18.979 65.396,19.305 ; 65.396,19.305 65.396,19.436 ; 65.396,19.436 65.396,19.69 ; 65.396,19.69 65.396,20.478 65.469,20.55 65.621,20.397 65.621,19.915 ; 65.396,19.69 65.621,19.915
NetR11_2: R11.2 R13.2 U3.8 | length 7
  Top Layer w0.25: U3.8 65.896,18.006 68.313,20.423 68.313,22.048 ; 68.517,22.506 68.313,22.302 ; 68.745,22.48 68.567,22.302 ; 68.313,22.048 68.313,22.302 ; 68.313,22.048 68.567,22.302 ; 68.313,22.302 68.567,22.302
NetR12_1: R12.1 R14.2 U3.10 | length 12.9
  Top Layer w0.25: 64.503,19.458 64.478,19.483 ; 64.859,20.651 64.896,20.614 64.896,18.861 ; U3.10 64.896,18.861 ; 63.792,19.966 R12.1@63.792,20.369 ; 63.792,19.966 63.332,20.425 R12.1 R12.1@63.792,20.369 ; 63.792,19.966 64.072,19.686 ; 63.792,19.966 63.919,20.093 63.919,20.242 R12.1@63.792,20.369 ; 64.072,19.686 64.072,20.042 64.275,20.245 64.275,19.686 64.478,19.483 ; 64.072,19.686 64.656,19.102 ; 64.478,19.483 64.478,20.321 64.656,20.143 64.656,19.102 ; 64.656,19.102 64.896,18.861
  Top Layer w0.4: R12.1 63.335,20.832 R14.2
NetR22_2: R22.2 S1.4
NetR25_2: R25.2 USB1.4
NetU2_2: U2.2 U2.4 | length 3.6
  Top Layer w0.4: U2.4 82.979,27.267 82.741,27.506 82.741,28.344 82.964,28.567 U2.2
NetU2_5: U2.5 U2.8 | length 4.2
  Top Layer w0.4: U2.5 90.757,27.267 91.046,27.556 91.046,28.725 90.554,29.217 U2.8
NetU5_14: U5.14 Y1.2
NetU5_15: U5.15 Y1.1
RDB: P4.11 U5.20
RS: P4.9 U5.18
RTCVDD: C18.2 U5.4
S1: S1.1 U5.44
S2: S1.3 U5.43
USBDM: U5.23 USB1.3
USBDP: U5.24 USB1.2
VCC: C3.2 D1.1 P3.1 R1.1 R2.1 R3.1 TYPE1.2 TYPE1.5 | length 24.7
  Top Layer w0.8: D1.1@82.428,11.25 82.478,11.3 R3.1 ; R3.1@85.458,11.275 R3.1 ; R1.1 R2.1 R3.1 ; TYPE1.5 94.436,9.349 95.174,8.611 95.174,7.343 94.179,6.349 TYPE1.2 86.996,6.349 86.195,7.15 C3.2 86.195,10.589 R3.1
VCOM: C14.1 U5.37
VDDIO: P4.5 R28.1 R30.1
VMCU: C16.2 R15.2 U5.2
VOUT: C9.1 C10.1 P2.1 P3.3 R9.2 R10.2 R12.2 U3.1 | length 33.7
  Top Layer w0.2: 58.776,21.845 59.055,21.54
  Top Layer w0.25: 61.709,18.645 61.709,17.807 62.526,16.99 64.355,16.99 ; 61.811,19.585 62.027,19.585 64.148,17.463 ; U3.1@64.685,16.99 U3.1@64.634,16.99 ; v1@73.724,21.058 73.851,20.931 v1(73.851,20.88) ; 64.148,17.463 64.148,17.197 64.355,16.99 ; 64.148,17.463 64.161,17.463 U3.1@64.634,16.99 ; 64.355,16.99 U3.1@64.634,16.99
  Top Layer w0.4: R9.2@65.926,22.887 66.332,23.293 v1(66.332,24.334)
  Top Layer w1.016: v3(59.398,19.737) 59.423,19.712 C9.1
  Bottom Layer w1.016: v3(59.398,19.737) 64.91,19.737 66.332,21.159 v1(66.332,24.334) 73.089,24.334 73.851,23.572 v1(73.851,20.88)
WRB: P4.10 U5.19
pads on no net: E1.1@42.647,60.884 E1.2@40.547,60.884 P4.6 P4.21 P4.22 TYPE1.0 TYPE1.3 TYPE1.4 U5.1 U5.5 U5.6 U5.7 U5.10 U5.33 U5.34 U5.41 U5.42 U5.46 U5.47 U5.48 U6.0 USB1.7 USB1.8 Y1.3 Y1.4
copper on no net:
  other v2: 90.005,18.419 90.767,18.438 89.167,19.619 90.005,19.619 90.767,19.638 89.167,20.819 90.005,20.819 90.767,20.838
  other v4: 89.167,18.419

## Polygon pours and split planes (outlines as drawn)
no net on Top Layer "Top Layer-No Net" (solid, pour order 10): 74.257,19.585
GND on Top Layer "Top Layer-GND 1" (solid, pour order 0): 71.92,19.483 71.946,19.458 74.511,19.458 74.511,13.489 59.398,13.489 59.398,8.409 55.588,8.409 55.588,16.537 62.192,16.537 62.192,14.886 71.717,14.886 71.717,19.483 74.511,19.483 74.511,19.458
GND on Top Layer "Top Layer-GND" (solid, pour order 8): 71.59,23.903 71.59,22.252 74.765,22.252 74.765,19.585 74.511,19.585 74.511,19.584 74.511,13.489 75.146,13.489 75.146,23.903
VOUT on Top Layer "Top Layer-VOUT" (solid, pour order 12): 64.402,17.222 62.04,19.585 61.913,19.458 61.913,16.867 64.402,16.867
no net on Top Layer "Top Layer-No Net 1" (solid, pour order 14): 62.014,16.867
GND on Top Layer "Top Layer-GND 2" (solid, pour order 2): 64.478,16.156 64.478,14.886 71.717,14.886 71.717,16.156
no net on Bottom Layer "Bottom Layer-No Net 1" (solid, pour order 4): 71.463,22.506
no net on Bottom Layer "Bottom Layer-No Net" (solid, pour order 6): 71.463,23.953

## Keep-outs
Keep-Out Layer:
  lines w0.5: 18.75,55.241 24.338,55.241 24.338,30.298 18.801,30.298 18.775,30.273 18.775,55.215

## Other copper
Top Layer:
  rectangle net GND: 71.59,22.252 73.368,23.903
  rectangle net GND: 74.384,19.407 74.765,19.585
  rectangle net GND: 71.869,22.429 72.934,23.75
  rectangle net GND: 71.717,15.978 74.511,19.585
  rectangle net GND: 71.133,15.673 72.276,16.079
  rectangle net GND: 70.269,13.489 74.511,15.165
  rectangle net GND: 70.676,13.59 74.308,14.682
  rectangle net GND: 64.478,15.292 67.374,16.156
  rectangle net GND: 64.478,15.648 66.993,16.156
  rectangle net GND: 59.398,21.998 62.065,24.03
  rectangle net GND: 55.588,14.682 60.465,16.537
  rectangle net GND: 55.944,14.098 58.839,14.886
  rectangle net NetC5_2: 68.872,18.213 70.828,21.769
  rectangle net NetC6_1: 67.297,9.171 74.308,13.057
  rectangle net NetL1_2: 62.522,15.165 64.046,16.613
  rectangle net NetL1_2: 59.83,8.383 63.97,12.828
  rectangle net NetR9_1: 65.265,20.067 67.247,21.337
  rectangle net NetR11_2: 68.186,22.328 70.768,26.62
  rectangle net NetR12_1: 62.776,20.194 65.011,23.801
  rectangle net VOUT: 55.588,21.54 58.89,24.03
  rectangle net VOUT: 55.588,17.426 62.141,21.617
  rectangle net VOUT: 65.265,22.379 67.297,25.02
  rectangle net VOUT: 71.92,19.94 74.435,21.82
  region net NetC6_1: 76.949,26.798 76.949,9.171 79.642,9.171 79.642,26.798
  region net NetC6_1: 74.155,13.057 74.155,9.171 77.051,9.171 77.051,13.057
  rectangle net NetC6_1: 71.793,24.614 77.102,26.798
  region net VOUT: 55.588,17.527 55.588,16.867 62.014,16.867 62.014,17.527
Bottom Layer:
  rectangle net NetL1_2: 62.522,8.358 64.046,16.613
  rectangle net NetL1_2: 59.83,8.358 64.097,12.828

## Silkscreen, mask and mechanical layers (free items; w line width, h text height)
Bottom Overlay:
  lines w0.254: 65.596,25.826 19.003,25.826 19.003,60.526 65.703,60.526 65.703,25.826
Mechanical 1:
  lines w0.254: 0.208,63.602 cw(c3.104,63.779) 2.926,66.675 96.698,66.675 ; 0.208,63.779 0.208,22.784 ; 96.737,66.675 cw(c96.915,63.779) 99.811,63.957 99.811,3.124 ; 97.093,0.066 ccw(c96.915,2.962) 99.811,3.139 ; 97.104,0.066 3.282,0.066 cw(c3.104,2.962) 0.208,2.784 0.208,22.784 ; 0.208,22.784 0.208,22.784 ; 18.601,30.24 24.201,30.24 24.201,55.24 18.601,55.24 18.601,30.24